# Altium PCB main.PcbDoc
Units mm, origin at the board's own origin, x right, y up, seen from the top; angles counter-clockwise.
Board outline 28 x 27.25 mm, 2 copper layers (Top Layer, Bottom Layer); 21 components, 20 nets, 98 pads, 37 vias.
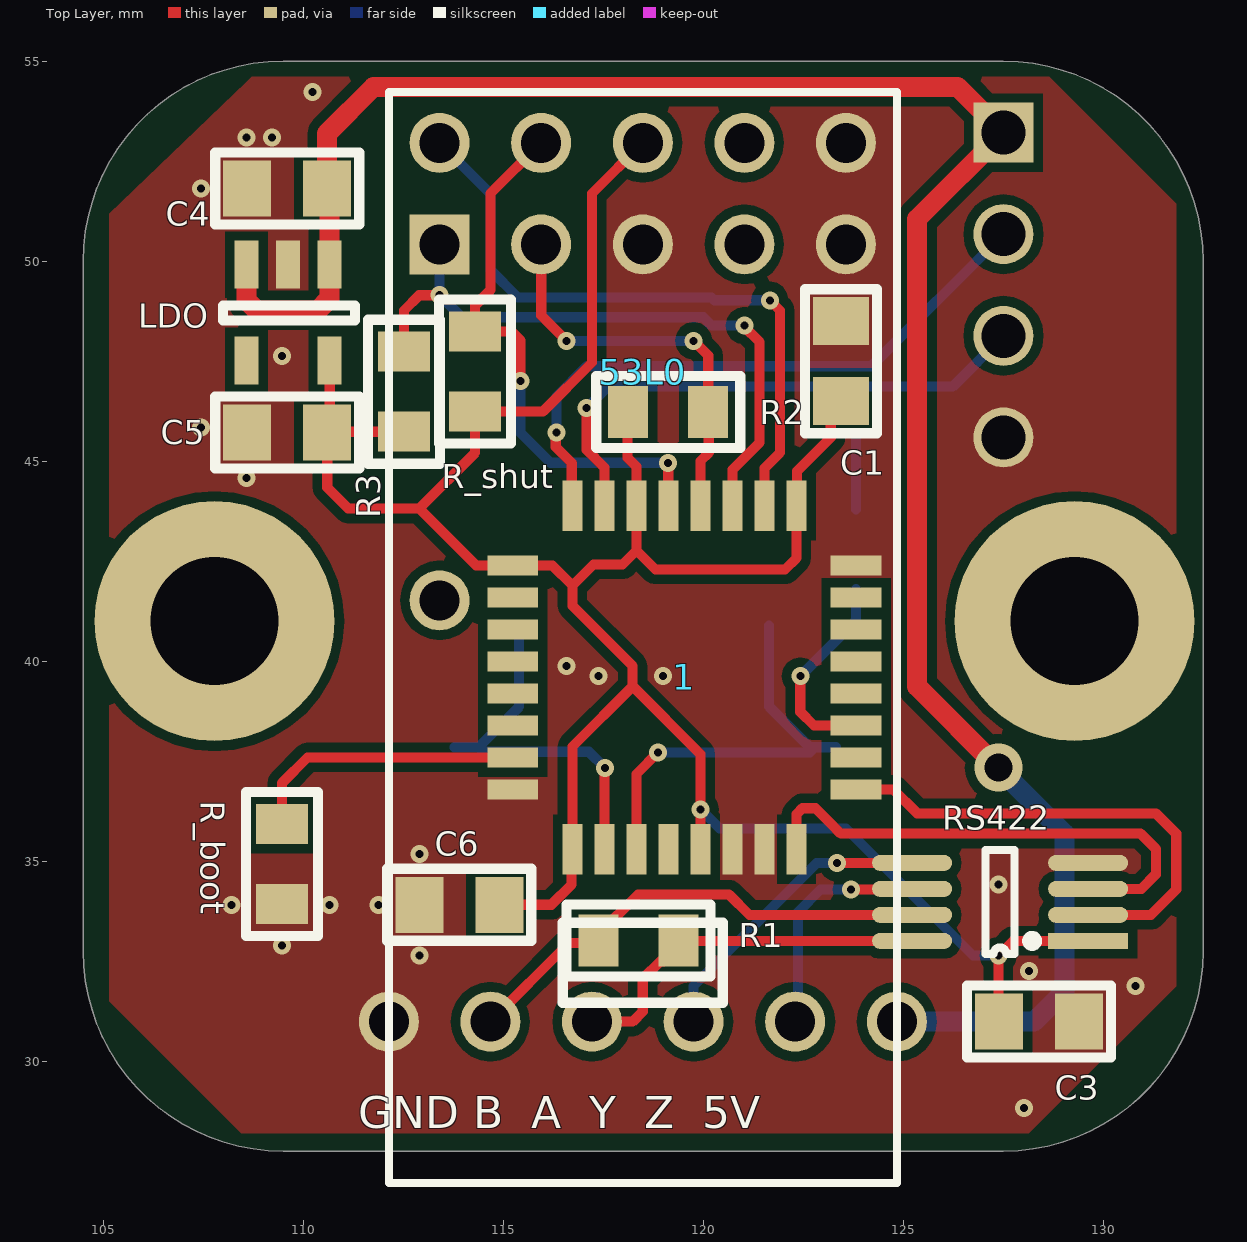
[diagram p0: Top Layer view]
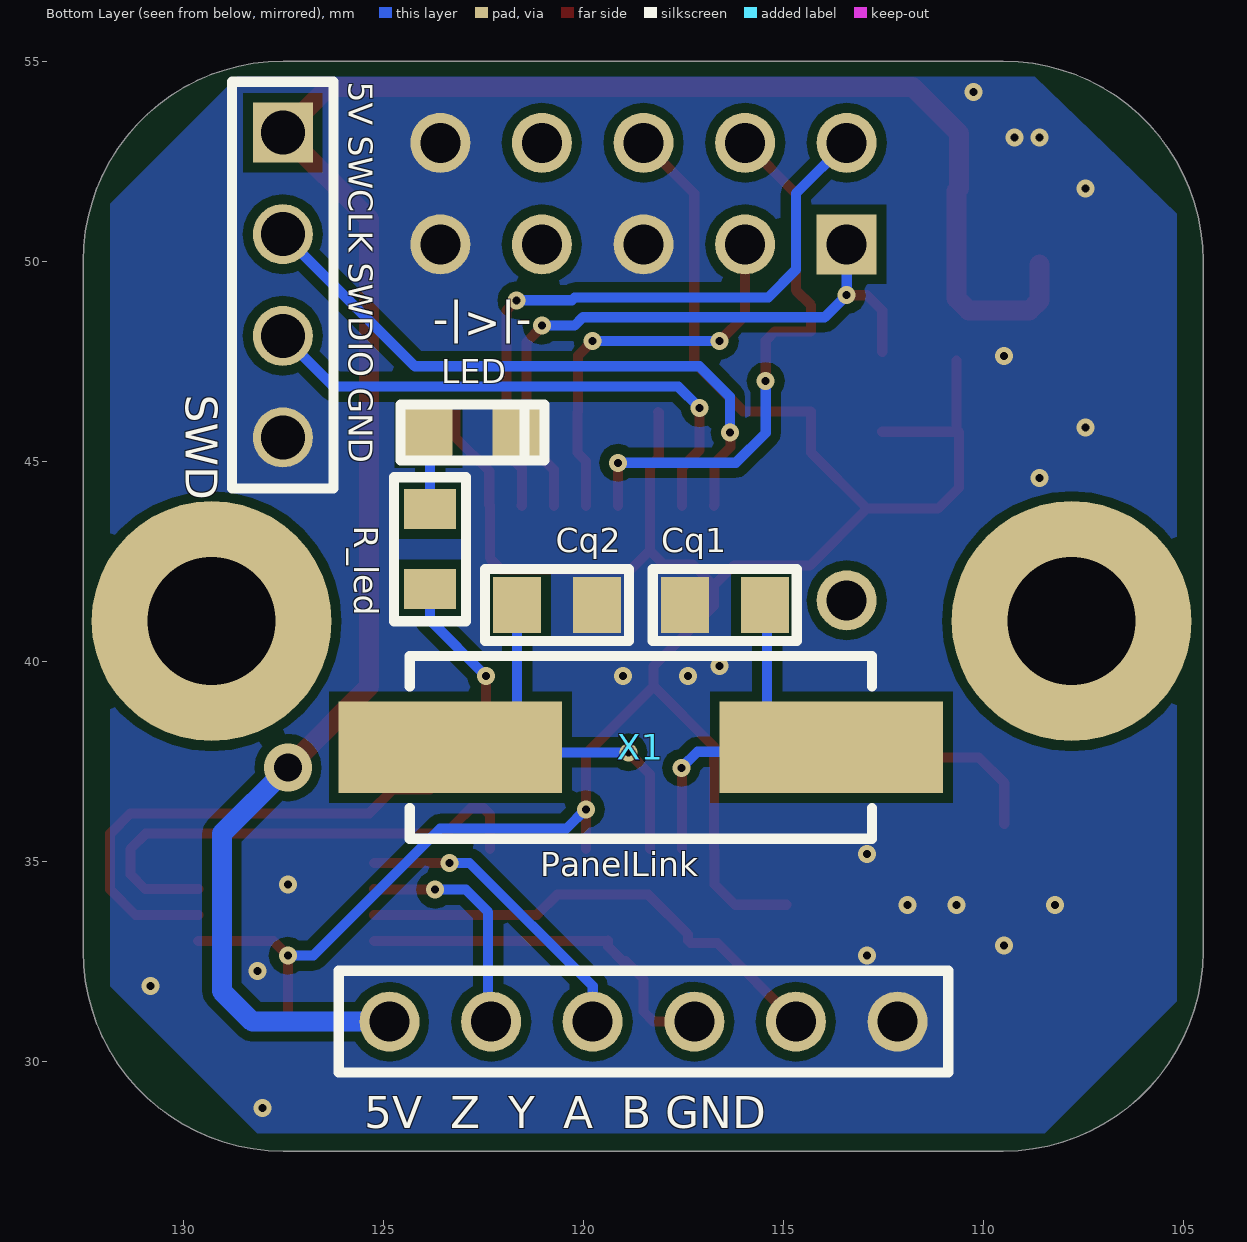
[diagram p1: Bottom Layer view, seen from below]

## Layer stack, top to bottom
Top Solder: solder mask 0.0102, Solder Resist, Dk 3.5
Top Layer: signal copper 0.0356
Dielectric 1: dielectric 0.32, FR-4, Dk 4.8
Bottom Layer: signal copper 0.0356
Bottom Solder: solder mask 0.0102, Solder Resist, Dk 3.5

## Board outline
104.5,32.75 104.5,50 cw(c109.5,50) 109.5,55 127.5,55 cw(c127.5,50) 132.5,50 132.5,32.75 cw(c127.5,32.75) 127.5,27.75 109.5,27.75 cw(c109.5,32.75)

## Design rules (kind name [scope] priority, off if disabled: settings)
Clearance [All] p1: gap=0.24 ignorepadtopadclearanceinfootprint=FALSE
ComponentClearance [All] p1: gap=0 collisioncheckmode=3 verticalgap=0 showdistances=FALSE
HoleSize [All] p1: absolutevalues=TRUE maxlimit=100 minlimit=0.025 maxpercent=80.000 minpercent=20.000
MinimumSolderMaskSliver [All] p1: minsoldermaskwidth=0
PolygonConnect [All] p1: connectstyle=Direct reliefconductorwidth=0.254 reliefentries=4 polygonreliefangle="90 Angle" airgapwidth=0.254
RoutingVias [All] p1: holewidth=0.2 width=0.45 viastyle="Through Hole" minholewidth=0.2 minwidth=0.45 maxholewidth=100 maxwidth=100
SilkToSilkClearance [All] p1: silktosilkclearance=0
SilkToSolderMaskClearance [IsPad] p1: minsilkscreentomaskgap=0 clearancetoexposedcopper=TRUE
SolderMaskExpansion [All] p1: expansion=0.102 istentingtop=FALSE
Width [All] p1: maxlimit=0.5 minlimit=0.254 preferedwidth=0.254
25 further rules are at their usual default settings.

## Classes and differential pairs
component class main: 1 "3V3   Z   Y   A   B   GND" C1 Cq1 Cq2 LED Q1 R1 R2 R3 R_boot R_led R_shut RS422 SWD X1

## Components (designator, comment, footprint, x,y, rotation, side; value= is the part's Value field where it differs from the comment)
1 "STM32F030" TQFP32-08 119.532,39.592 r90 top
53L0 "53L0_SATEL_I1" 53L1X-SATEL-I1 113.411,52.959 r90 top
C1 "100nF" FP_0805_CAP_085 123.444,47.498 r270 top
C3 "100nF" FP_0805_CAP_085 128.397,30.988 r180 top
C4 "1uF" FP_0805_CAP_085 109.601,51.816 r0 top
C5 "1uF" FP_0805_CAP_085 109.601,45.72 r180 top
C6 "100nF" FP_0805_CAP_085 113.903,33.909 r0 top
Cq1 "22pF" FP_0805_CAP_085 116.459,41.402 r180 bottom
Cq2 "=Value" FP_0805_CAP_085 120.65,41.402 r0 bottom
LDO "RT9013 LDO Voltage Regulator" RT9013_SOT23 110.665,49.911 r270 top (schematic designator LDO1)
LED "LED Red" FP_0805_LED_RED 123.766,45.72 r180 bottom
PanelLink "JUMPER_6" JUMPER_6 124.841,30.988 r180 bottom
R1 "120R" FP_0805_RES 118.38,33.02 r180 top
R2 "1K" FP_0805_RES 119.126,46.228 r180 top
R3 "1K" FP_0805_RES 112.522,46.736 r270 top
R_boot "10K" FP_0805_RES 109.474,34.925 r90 top
R_led "1K" FP_0805_RES 123.825,42.799 r270 bottom
R_shut "10K" FP_0805_RES 114.3,47.244 r270 top
RS422 "RS-422" NSOIC-8 129.622,33.005 r180 top
SWD "Connector" FP_CONN4_TUSKE_254MM 127.508,53.213 r0 bottom
X1 "8MHz" FP_CRYSTAL_HC49_SMD 123.317,37.846 r180 bottom

## Footprints (in the part's own frame and the unit in brackets; to place one, negate y for a bottom-side part, rotate by r counter-clockwise, add the part's x,y. Pads: shape width x height; smd on the part's side, far side on the other; paste and mask are expansions set on the pad)
53L1X-SATEL-I1 [mm] "53L1X-SATEL-I1 breakout board"
  round 1.5 hole 1: 0(-11.44,0) 1(0,0) 3(0,-2.54) 4(-2.54,-2.54) 5(0,-5.08) 6(-2.54,-5.08) 7(0,-7.62) 8(-2.54,-7.62) 9(0,-10.16) 10(-2.54,-10.16)
  rect 1.5x1.5 hole 1: 2(-2.54,0)
  silkscreen extent -26,-11.43 1.27,1.27
FP_0805_CAP_085 [mm] "0805 kapacitás YAGEO 0.85mm magas"
  rect 1.2x1.4 smd: 1(-1,0) 2(1,0)
  silkscreen extent -1.8,-0.9 1.8,0.9, body extent -1,-0.64 1.03,0.64, height 0.85
FP_0805_LED_RED [mm] "0805 méretû piros LED"
  rect 1.2x1.3 smd: A(-0.1,0) K(2.1,0)
  silkscreen extent -0.8,-0.7 2.8,0.7, body extent 0.01,-0.63 2.03,0.62, height 1.1
FP_0805_RES [mm] "0805 ellenállás"
  rect 1x1.3 smd: 1(-1,0) 2(1,0)
  silkscreen extent -1.8,-0.9 1.8,0.9, body extent -1,-0.62 1,0.63, height 0.62
FP_CONN4_TUSKE_254MM [mm] "4×1 tüskesor"
  rect 1.5x1.5 hole 1.1: 1(0,0)
  round 1.5 hole 1.1: 2(0,2.54) 3(0,5.08) 4(0,7.62)
  silkscreen extent -1.27,-1.27 1.27,8.9, body extent -1.27,-1.27 1.27,8.89, height 8.54
FP_CRYSTAL_HC49_SMD [mil] "HC49/SMD"
  rect 220x90 smd: 1(0,0) 2(375,0)
  silkscreen extent -40,-90 415,90, body extent -57,-90 432,90, height 130
JUMPER_6 [mm]
  round 1.5 hole 1: 1(0,0) 2(2.54,0) 3(5.08,0) 4(7.62,0) 5(10.16,0) 6(12.7,0)
  silkscreen extent -1.27,-1.27 13.97,1.27
NSOIC-8 [mm]
  rect 2x0.4 smd: 1(0,0)
  oval 2x0.4 smd: 2(0,-0.65) 3(0,-1.3) 4(0,-1.95) 5(4.4,-1.95) 6(4.4,-1.3) 7(4.4,-0.65) 8(4.4,0)
  silkscreen extent 1.27,-2.28 2.56,0.33
RT9013_SOT23 [mm] "RT9013 LDO Voltage Regulator"
  rect 1.2x0.6 smd: EN(0,-2.08) GND(0,-1.04) NC(2.4,-2.08) Vin(0,0) Vout(2.4,0)
  silkscreen extent 1.02,-2.67 1.4,0.64
TQFP32-08 [mil]
  rect 50x20 smd: 1(-169,110.24) 2(-169,78.74) 3(-169,47.24) 4(-169,15.75) 5(-169,-15.75) 6(-169,-47.24) 7(-169,-78.74) 8(-169,-110.24) 17(169,-110.24) 18(169,-78.74) 19(169,-47.24) 20(169,-15.75) 21(169,15.75) 22(169,47.24) 23(169,78.74) 24(169,110.24)
  rect 20x50 smd: 9(-110.24,-169) 10(-78.74,-169) 11(-47.24,-169) 12(-15.75,-169) 13(15.75,-169) 14(47.24,-169) 15(78.74,-169) 16(110.24,-169) 25(110.24,169) 26(78.74,169) 27(47.24,169) 28(15.75,169) 29(-15.75,169) 30(-47.24,169) 31(-78.74,169) 32(-110.24,169)

## Part data
1: Package=TQFP32-08, DeviceSetName=STM32F030, GateName_1=G$1, LibraryName=stm32F030x, SymbolName_1=STM32F030X
C1 C3 C6: library part "CAP 100nF", "Capacitor", Tolerance=+80%/-20%, Voltage=25V, Name="SMD Multilayer Ceramic Capacitor, 0805", Reference=1759167, Supplier=Farnell
C4 C5: library part "CAP 1uF", "Capacitor", Tolerance=+80%/-20%, Voltage=25V, Name="SMD Multilayer Ceramic Capacitor, 0805", Reference=1828853, Supplier=Farnell
Cq1 Cq2: library part "CAP 22pF", "Capacitor", Tolerance=5%, Voltage=50V, Name="SMD Multilayer Ceramic Capacitor, 0805", Reference=1759195, Supplier=Farnell
LDO: library part RT9013, "LDO Voltage Regulator"
LED: "Red LED", I_max=20mA, Name="MULTICOMP  MCL-S270SRC  LED, Red, SMD, 1.25mm x 1.4mm, 20 mA, 1.85 V, 643 nm", Reference=1581239, Supplier=Farnell, U_fw=1.85V, Wavelength=643nm
R1: library part "RES 120R", "Resistor", Power=125mW, Tolerance=5%, Name="YAGEO (PHYCOMP)  RC0805JR-07120RL  SMD Chip Resistor, Thick Film, 120 ohm", Reference=9233890, Supplier=Farnell
R2 R3 R_led: library part "RES 1K", "Resistor", Power=125mW, Tolerance=5%, Name="YAGEO (PHYCOMP)  RC0805JR-071KL  SMD Chip Resistor, Thick Film, 1 kohm", Reference=9234004, Supplier=Farnell
R_boot R_shut: library part "RES 10K", "Resistor", Power=125mW, Tolerance=5%, Name="YAGEO (PHYCOMP)  RC0805JR-0710KL  SMD Chip Resistor, Thick Film, 10 kohm", Reference=9234136, Supplier=Farnell
RS422: library part ISL83071, "RS-422 transceiver 3V3"
SWD: library part Connector_4pin, "4pin Connector"
X1: library part Crystal, "Quarz Crystal"

## Free pads (board coordinates)
  round 6 hole 3.2: ""(107.786,41) ""(129.286,41)

## Via types
v1: diameter 0.45, hole 0.2, Top Layer to Bottom Layer, 36 vias
v2: diameter 1.2, hole 0.7, Top Layer to Bottom Layer, 1 vias

## Nets (pads, with @x,y where several pads share a name; then routed paths per layer and width w, separated by ;. In a path a pad name is that pad's centre, name@x,y a point inside that pad or via, vN(x,y) a via of type N, cw(c..) or ccw(c..) an arc to the next point about the centre after c; other vN are vias at no path point)
3V3: 1.1 1.5 1.17 1.22 1.25 53L0.5 C1.2 C3.2 C5.1 C6.2 LDO.Vout R2.2 R3.2 R_shut.2 RS422.1 | length 67.2
  Top Layer w0.254: LDO.Vout 110.665,45.784 C5.1@110.617,45.736 ; R3.2 C5.1@110.617,45.736 ; C6.2@114.919,33.909 116.205,33.909 116.713,34.417 116.713,35.28 1.1 116.732,37.865 118.237,39.37 ; R2.2 118.11,46.212 118.11,45.085 118.333,44.862 1.22 118.333,42.768 ; 53L0.5 117.221,51.689 117.221,47.466 115.999,46.244 R_shut.2 114.3,45.212 112.903,43.815 ; 1.5 v1(119.932,36.296) 119.932,37.675 118.237,39.37 ; C1.2@123.19,46.355 123.19,45.593 122.349,44.752 122.349,43.901 1.17 122.332,42.576 122.047,42.291 118.809,42.291 118.333,42.768 ; C3.2 127.381,31.004 v1(127.381,32.639) 127.747,33.005 RS422.1 ; C5.1@110.617,45.736 C5.1 110.601,44.339 111.125,43.815 112.903,43.815 ; 112.903,43.815 114.326,42.392 1.25 116.231,42.392 116.732,41.891 ; 116.732,41.891 116.732,41.383 118.237,39.878 118.237,39.37 ; 116.732,41.891 117.26,42.418 117.983,42.418 118.333,42.768
  Bottom Layer w0.254: v1(119.932,36.296) 120.415,35.814 123.571,35.814 126.746,32.639 v1(127.381,32.639)
5V: C4.2 LDO.EN LDO.Vin PanelLink.1 SWD.1 | length 53.6
  Top Layer w0.5: LDO.EN 108.585,49.022 108.839,48.768 110.363,48.768 110.665,49.07 LDO.Vin 110.665,51.752 C4.2 110.601,53.197 111.76,54.356 126.365,54.356 SWD.1 125.349,51.054 125.349,39.37 v2(127.381,37.338)
  Bottom Layer w0.5: PanelLink.1 128.27,30.988 129.032,31.75 129.032,35.687 v2(127.381,37.338)
A: PanelLink.4 R1.1 RS422.8 | length 9.6
  Top Layer w0.254: PanelLink.4 118.237,30.988 118.491,31.242 118.491,32.056 118.932,32.497 119.007,32.497 119.38,32.87 R1.1 119.395,33.005 RS422.8
  Bottom Layer w0.254: PanelLink.4@117.221,31.496 PanelLink.4@117.332,31.607
B: PanelLink.5 R1.2 RS422.7 | length 12.2
  Top Layer w0.254: PanelLink.5 116.648,32.955 117.315,32.955 R1.2 117.38,33.17 118.373,34.163 120.65,34.163 121.158,33.655 RS422.7
GND: 1.6 1.7 1.16 1.32 53L0.6 53L0.9 53L0.10 C1.1 C3.1 C4.1 C5.2 C6.1 Cq1.1 Cq2.1 LDO.GND LED.K PanelLink.6 R_boot.1 RS422.4 SWD.4
  other v1: 128.016,28.829 130.81,31.877 128.143,32.258 112.903,32.639 109.474,32.893 108.204,33.909 110.665,33.909 111.887,33.909 127.381,34.417 112.903,35.179 117.38,39.624 118.999,39.624 116.586,39.878 108.585,44.577 107.442,45.847 109.474,47.625 107.442,51.816 108.585,53.086 109.22,53.086 110.236,54.229
Net1_2: 1.2 Cq1.2 X1.2 | length 9.5
  Top Layer w0.254: 1.2 117.532,37.32 v1(117.544,37.332)
  Bottom Layer w0.254: X1.2 X1.2@114.384,37.846 ; Cq1.2@115.4,40.894 115.4,38.862 X1.2@114.384,37.846 ; v1(117.544,37.332) 117.532,37.344 117.141,37.736 114.494,37.736 X1.2@114.384,37.846
Net1_3: 1.3 Cq2.2 X1.1 | length 10.7
  Top Layer w0.254: 1.3 118.333,37.18 v1(118.872,37.719)
  Bottom Layer w0.254: v1(118.872,37.719) 122.666,37.719 X1.1@122.793,37.846 ; Cq2.2@121.65,40.894 121.65,38.862 122.666,37.846 X1.1@122.793,37.846 ; X1.1 123.19,37.846 X1.1@122.793,37.846
Net1_11: 1.11 R_led.2 | length 5.2
  Top Layer w0.254: v1(122.428,39.624) 122.428,38.735 122.771,38.392 1.11
  Bottom Layer w0.254: v1(122.428,39.624) 123.825,41.021 R_led.2
Net1_18: 1.18 53L0.1 | length 16.4
  Top Layer w0.254: 1.18@121.539,43.891 1.18 121.532,44.824 121.92,45.212 121.92,48.768 v1(121.666,49.022)
  Bottom Layer w0.254: 53L0.1 114.681,51.689 114.681,49.784 115.373,49.092 120.211,49.092 120.281,49.022 v1(121.666,49.022)
Net1_19: 1.19 53L0.2 R3.1 | length 16.2
  Top Layer w0.254: R3.1 112.522,48.768 112.903,49.149 v1(113.411,49.149) ; 1.19 120.732,44.786 121.412,45.466 121.412,47.979 121.031,48.36 v1(121.031,48.387)
  Bottom Layer w0.254: 53L0.2 v1(113.411,49.149) 113.962,48.598 120.006,48.598 120.217,48.387 v1(121.031,48.387)
Net1_20: 1.20 53L0.4 R2.1 | length 10.2
  Top Layer w0.254: 53L0.4 115.951,48.641 v1(116.586,48.006) ; v1(119.761,48.006) 120.126,47.641 R2.1 120.142,46.212 120.142,45.212 119.932,45.002 1.20
  Bottom Layer w0.254: v1(116.586,48.006) v1(119.761,48.006)
Net1_21: 1.21 53L0.3 R_shut.1 | length 14
  Top Layer w0.254: v1(115.436,47.004) 115.436,48.013 115.205,48.244 R_shut.1 114.3,48.895 114.681,49.276 114.681,51.689 53L0.3 ; v1(119.127,44.957) 119.127,43.89 1.21
  Bottom Layer w0.254: v1(115.436,47.004) 115.436,45.705 116.183,44.958 v1(119.127,44.957) v1(119.127,44.957)
Net1_31: 1.31 R_boot.2 | length 7.1
  Top Layer w0.254: R_boot.2 109.474,36.957 110.109,37.592 1.31 1.31@115.224,37.576
NetLED_1: LED.A R_led.1 | length 1.8
  Bottom Layer w0.254: R_led.1 LED.A@123.825,45.593
PanelLinkRX: 1.9 RS422.2 | length 12.3
  Top Layer w0.254: 1.9 124.752,36.792 125.349,36.195 131.318,36.195 131.826,35.687 131.826,34.29 131.191,33.655 RS422.2
PanelLinkTX: 1.8 RS422.3 | length 12.8
  Top Layer w0.254: 1.8 122.332,36.173 122.481,36.322 122.809,36.322 123.19,35.941 123.444,35.687 130.937,35.687 131.318,35.306 131.318,34.671 130.952,34.305 RS422.3
SYS_SWCLK: 1.24 SWD.2 | length 15.8
  Top Layer w0.254: v1(116.332,45.72) 116.316,45.704 116.316,45.355 116.717,44.954 116.717,43.9 1.24
  Bottom Layer w0.254: v1(116.332,45.72) 116.332,46.609 117.094,47.371 124.206,47.371 SWD.2
SYS_SWDIO: 1.23 SWD.3 | length 13.8
  Top Layer w0.254: v1(117.087,46.327) 117.087,45.282 117.532,44.837 1.23
  Bottom Layer w0.254: v1(117.087,46.327) 117.623,46.863 126.238,46.863 SWD.3
Y: PanelLink.3 RS422.5 | length 7.6
  Top Layer w0.254: v1(123.347,34.955) RS422.5
  Bottom Layer w0.254: PanelLink.3 119.761,31.877 122.839,34.955 v1(123.347,34.955)
Z: PanelLink.2 RS422.6 | length 5.9
  Top Layer w0.254: v1(123.698,34.29) 125.207,34.29 RS422.6
  Bottom Layer w0.254: PanelLink.2 122.375,31.062 122.375,33.729 122.936,34.29 v1(123.698,34.29)
pads on no net: 1.4 1.10 1.12 1.13 1.14 1.15 1.26 1.27 1.28 1.29 1.30 53L0.0 53L0.7 53L0.8 LDO.NC

## Polygon pours and split planes (outlines as drawn)
GND on Top Layer "GND_L01_P000" (solid, remove dead copper, pour order 0): 108.585,54.483 108.712,54.61 128.651,54.61 131.826,51.435 131.826,31.877 128.143,28.194 108.458,28.194 105.156,31.496 105.156,51.181
GND on Bottom Layer "GND_L02_P002" (solid, remove dead copper, pour order 2): 108.712,54.61 128.651,54.61 131.826,51.435 131.826,31.877 128.143,28.194 108.458,28.194 105.156,31.496 105.156,51.181

## Silkscreen, mask and mechanical layers (free items; w line width, h text height)
Top Overlay:
  text "GND B  A  Y  Z  5V" at 111.379,28.321 h0.8
Bottom Overlay:
  text "5V SWCLK SWDIO GND" at 125.857,54.483 h0.6 r90
  text "-|<|-" at 121.285,48.768 h0.8 r180
  text "5V  Z  Y  A  B GND" at 125.476,28.321 h0.8
Mechanical 1:
  the board outline again, w0.254